# Altium PCB SEN_REVC.PcbDoc
Units mm, origin at the board's own origin, x right, y up, seen from the top; angles counter-clockwise.
Board outline 95.88 x 101.01 mm, 4 copper layers (Top Layer, GND, GND (Plane2), Bottom Layer), stack 1.586 mm thick; 59 components, 95 nets, 247 pads, 113 vias.
Unrouted connection lines stored in the file: 1.
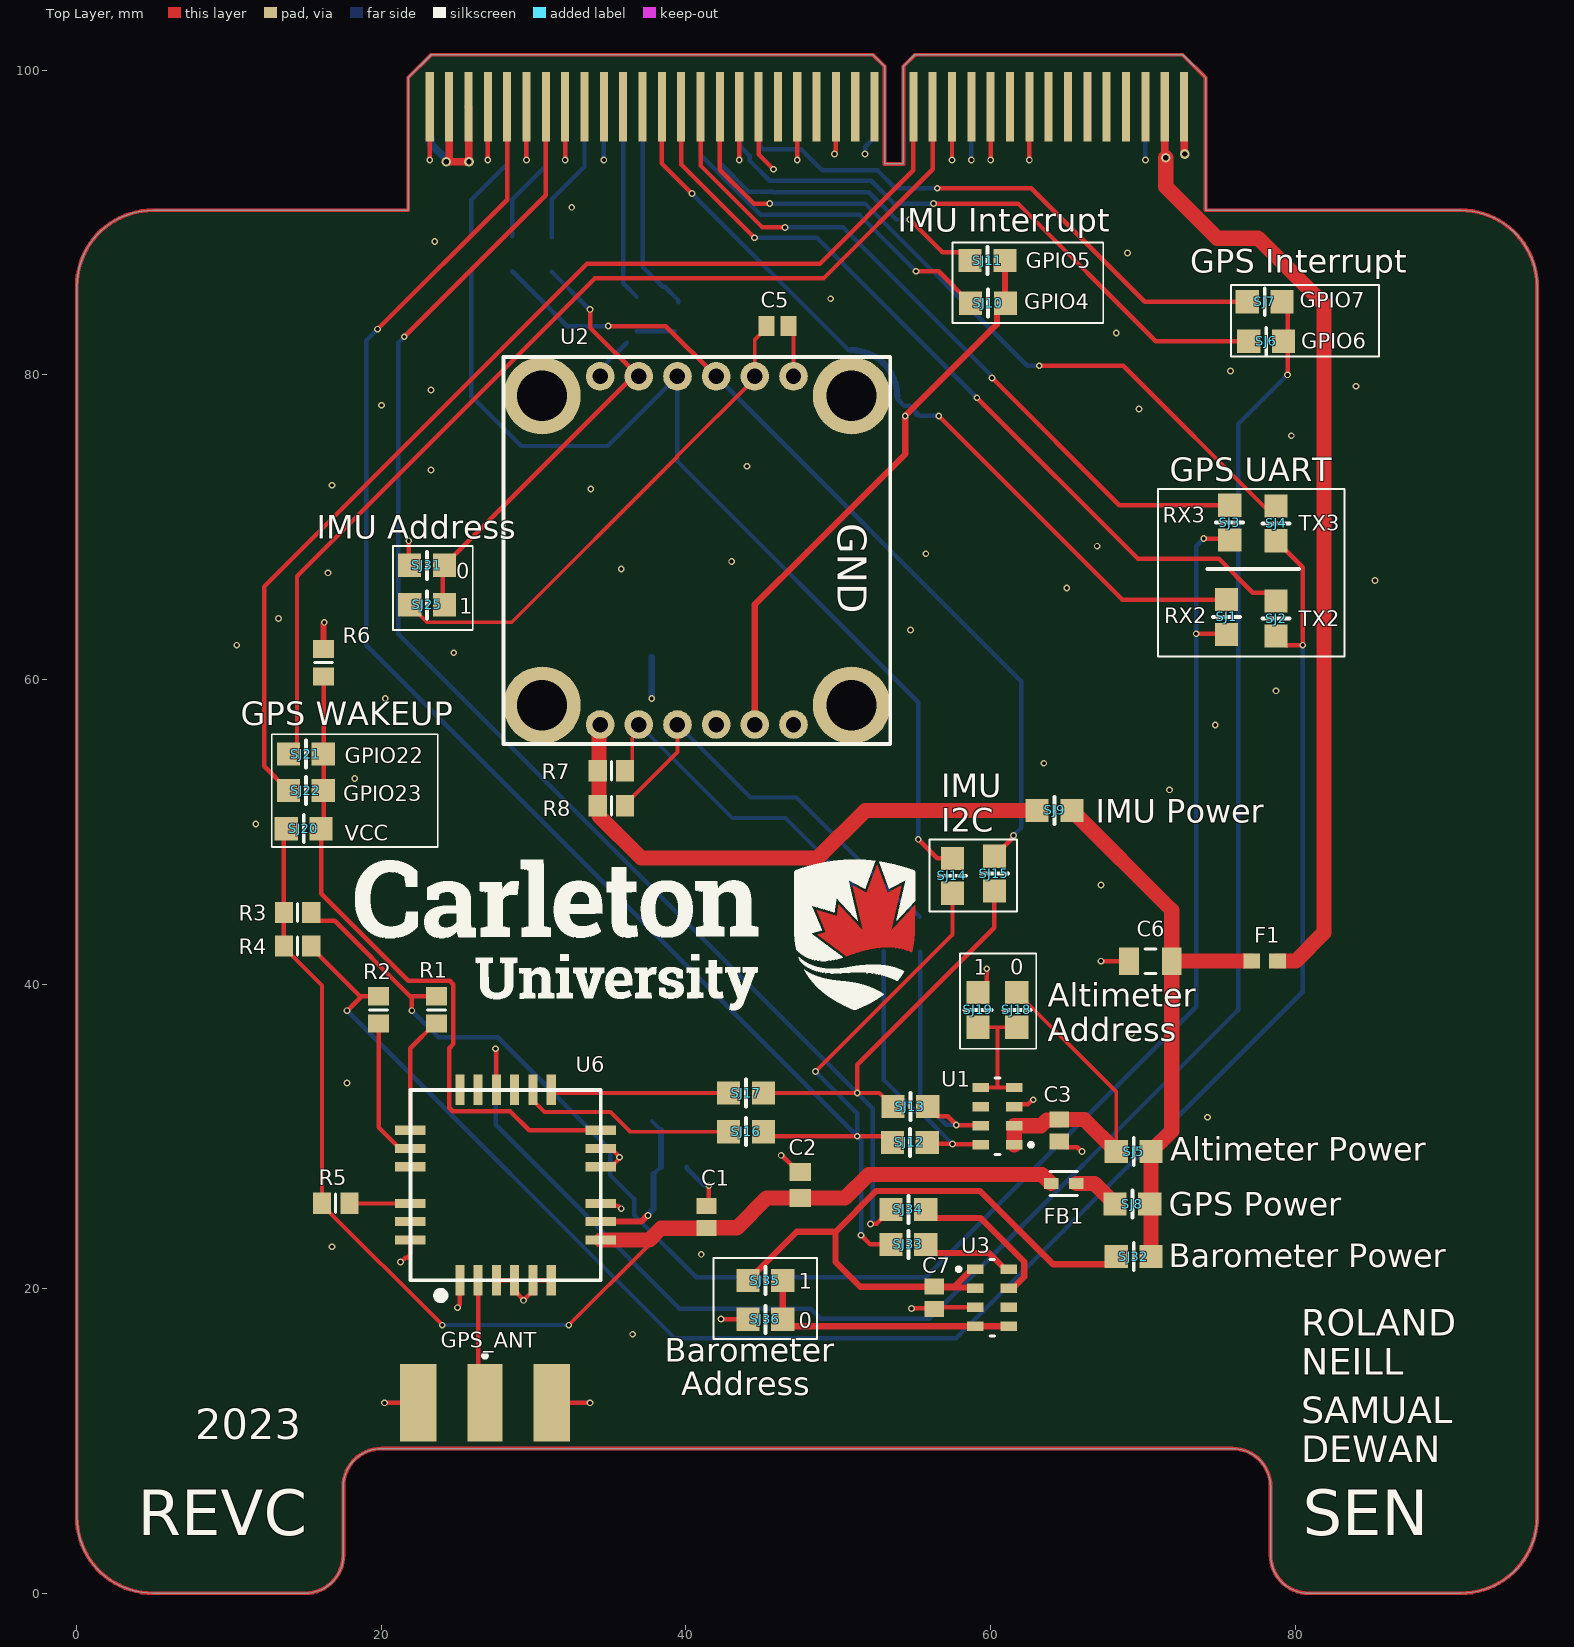
[diagram p0: Top Layer view]
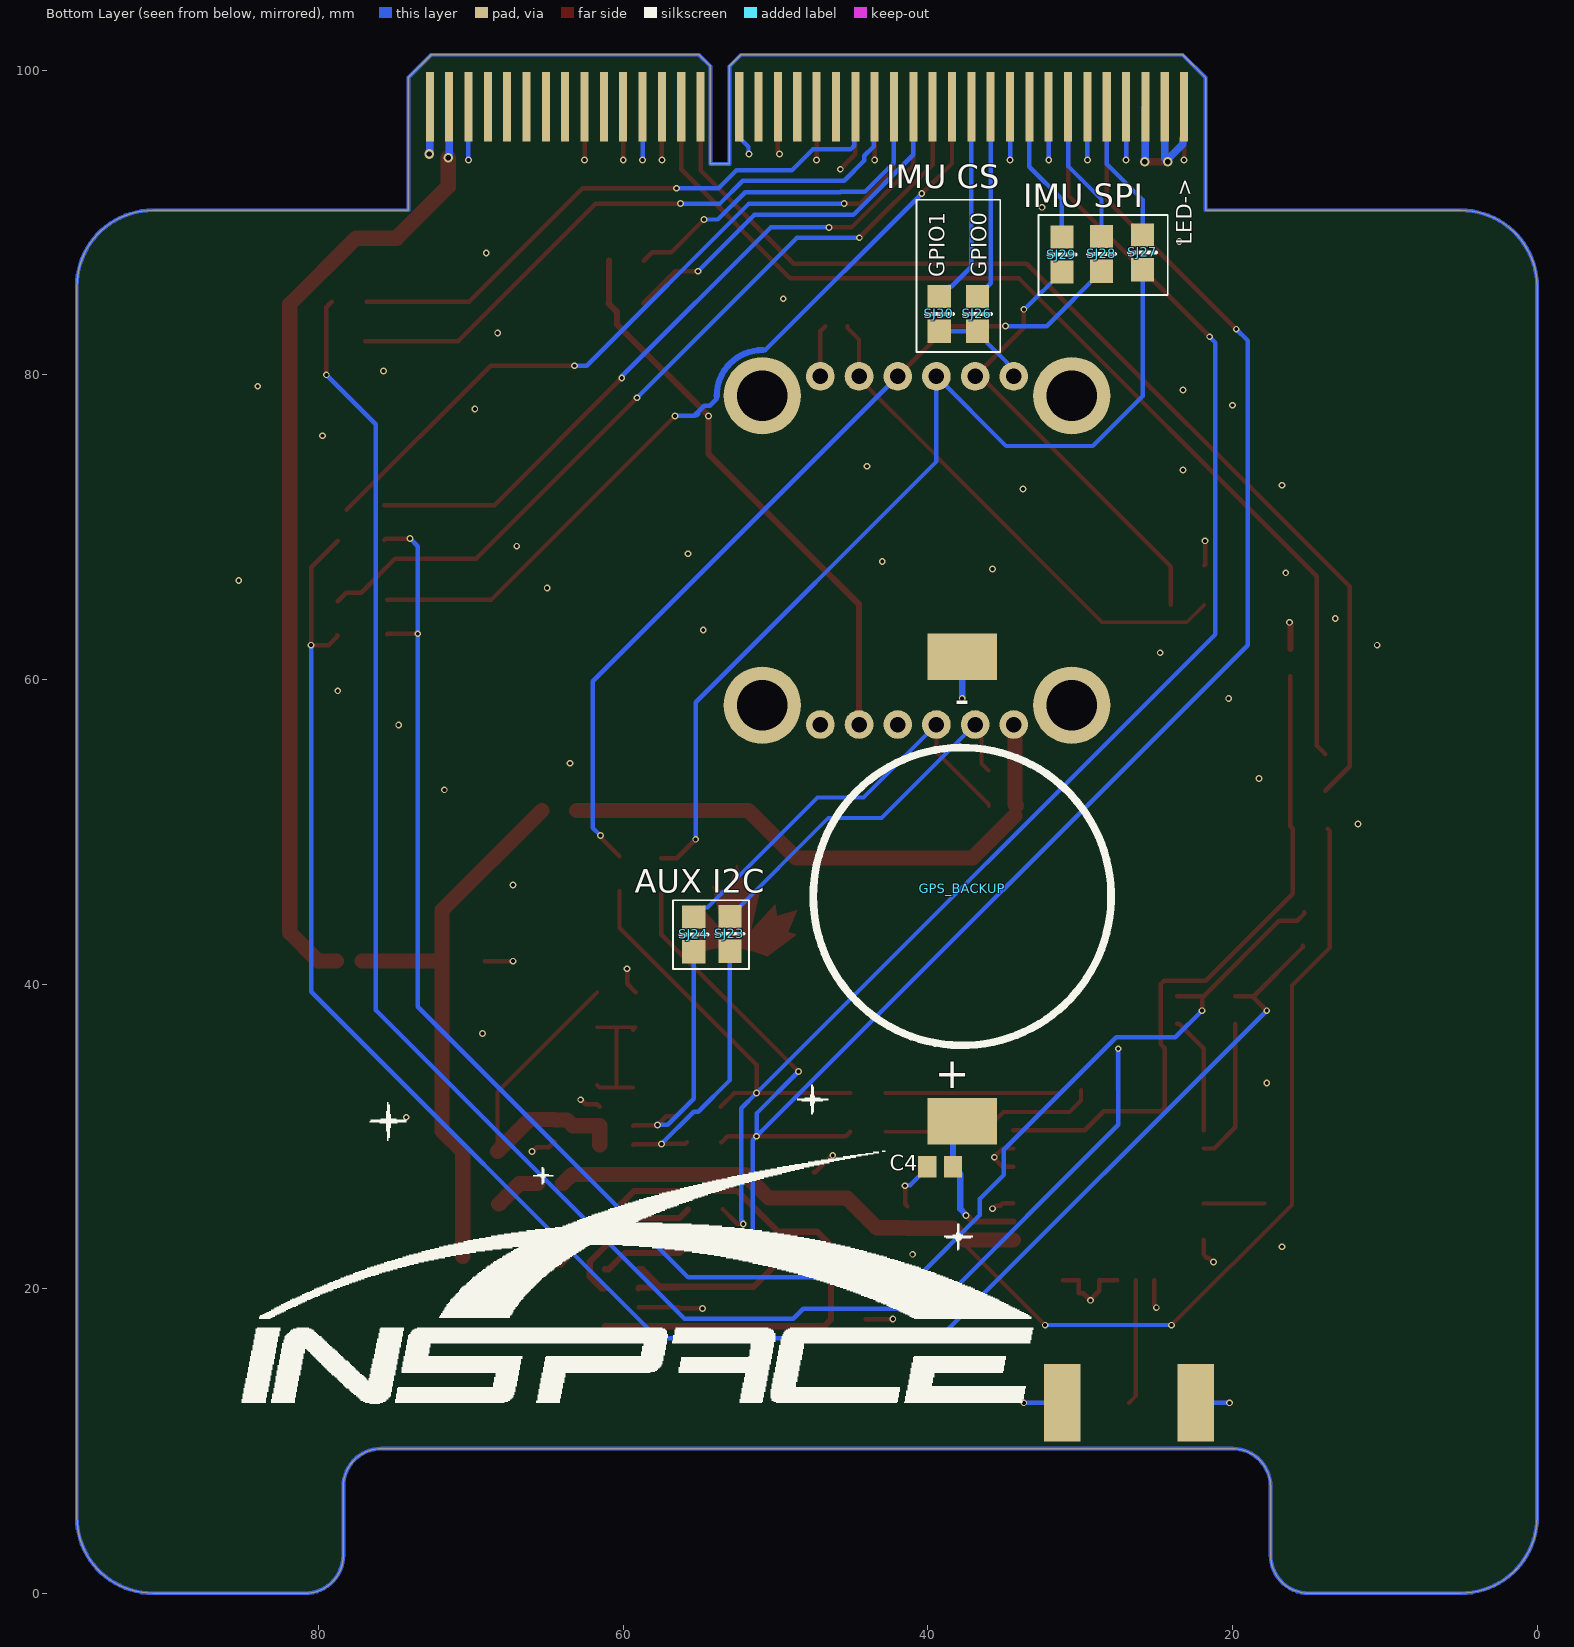
[diagram p1: Bottom Layer view, seen from below]
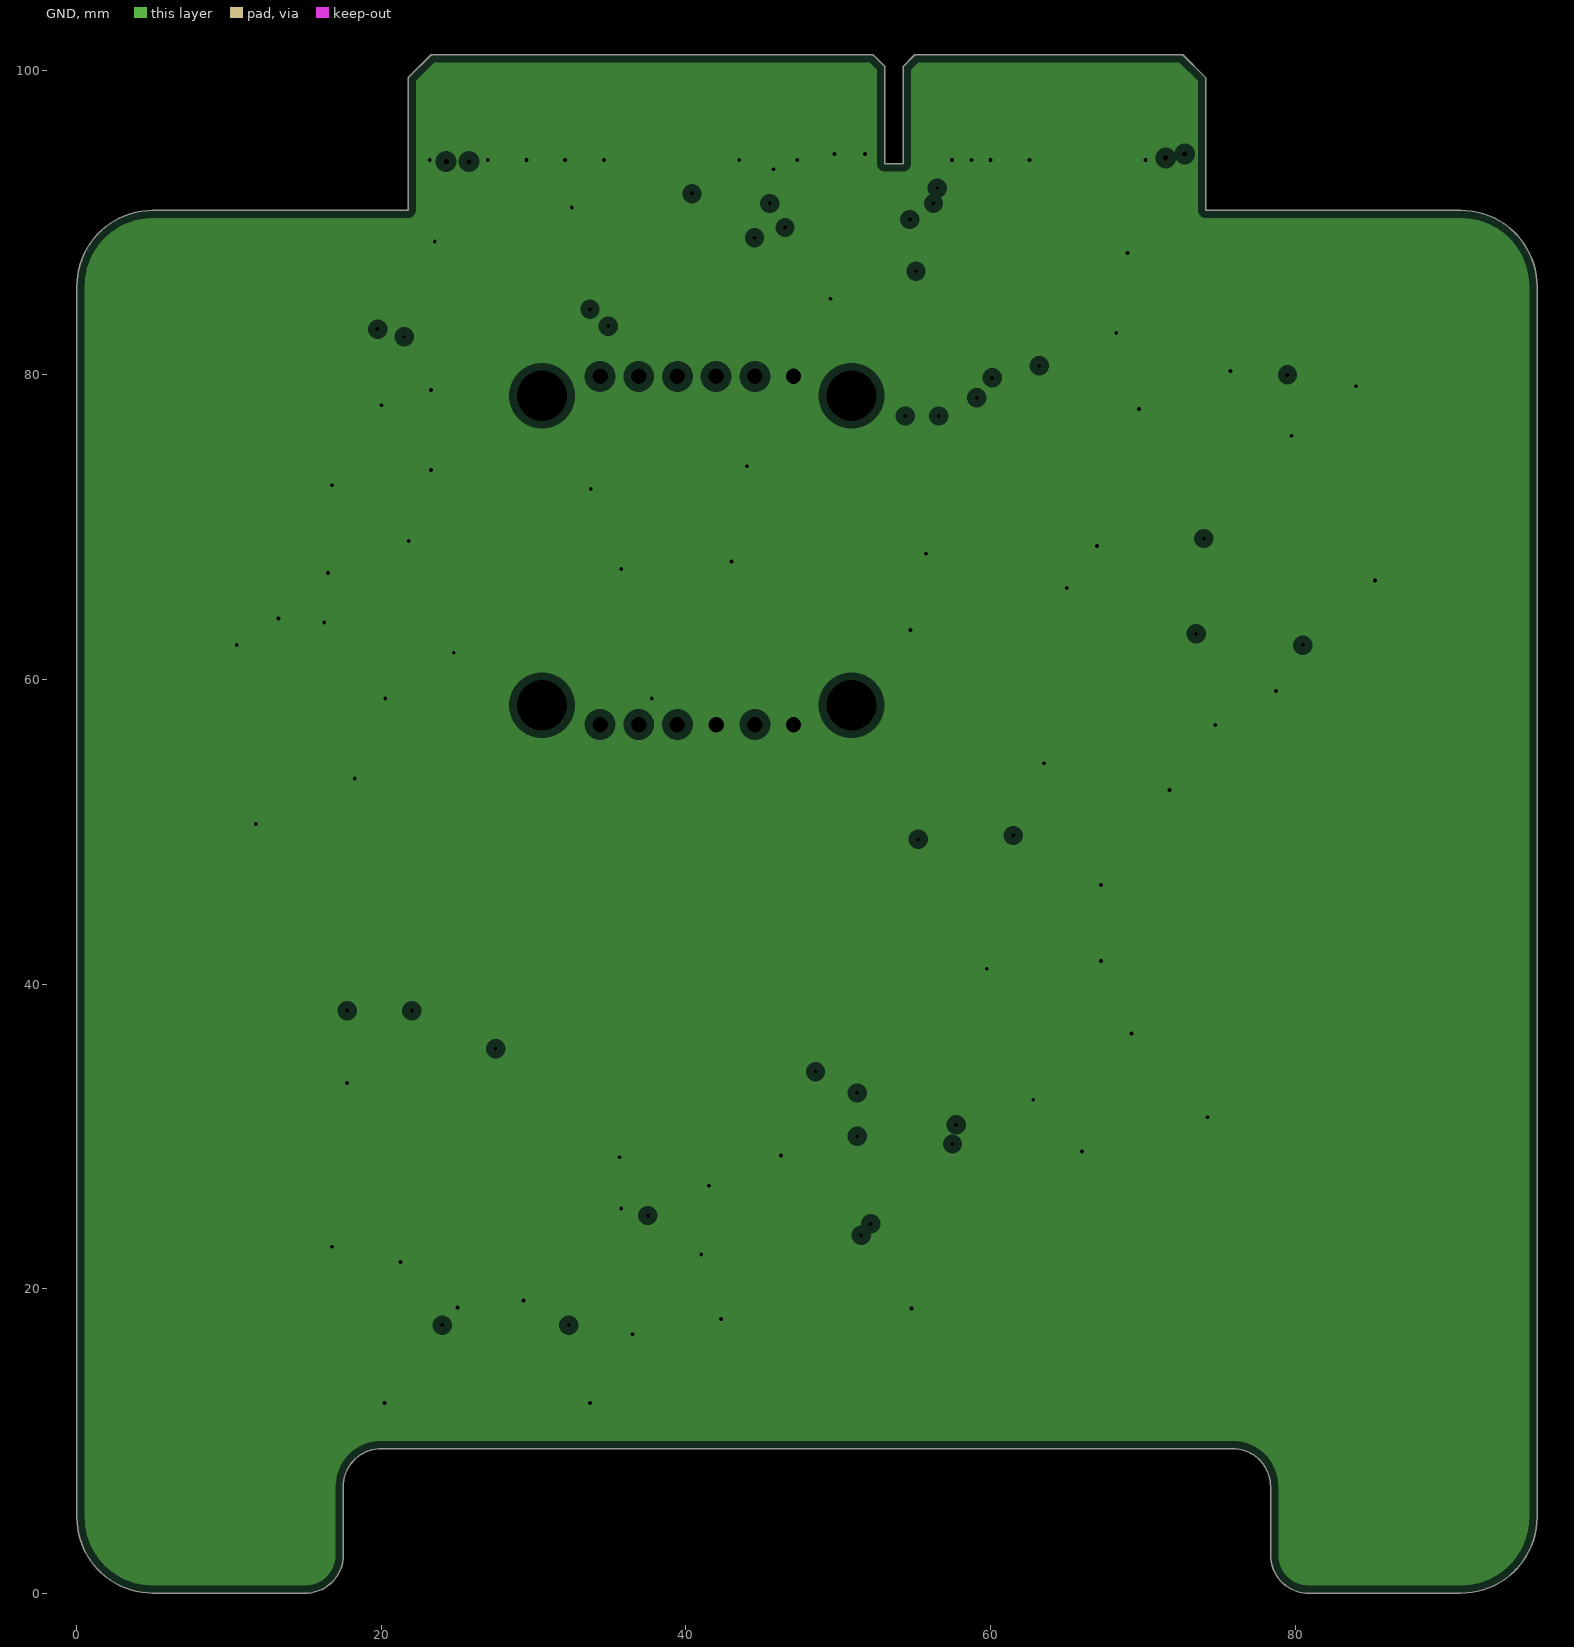
[diagram p2: GND, clearances drawn from the general rule]
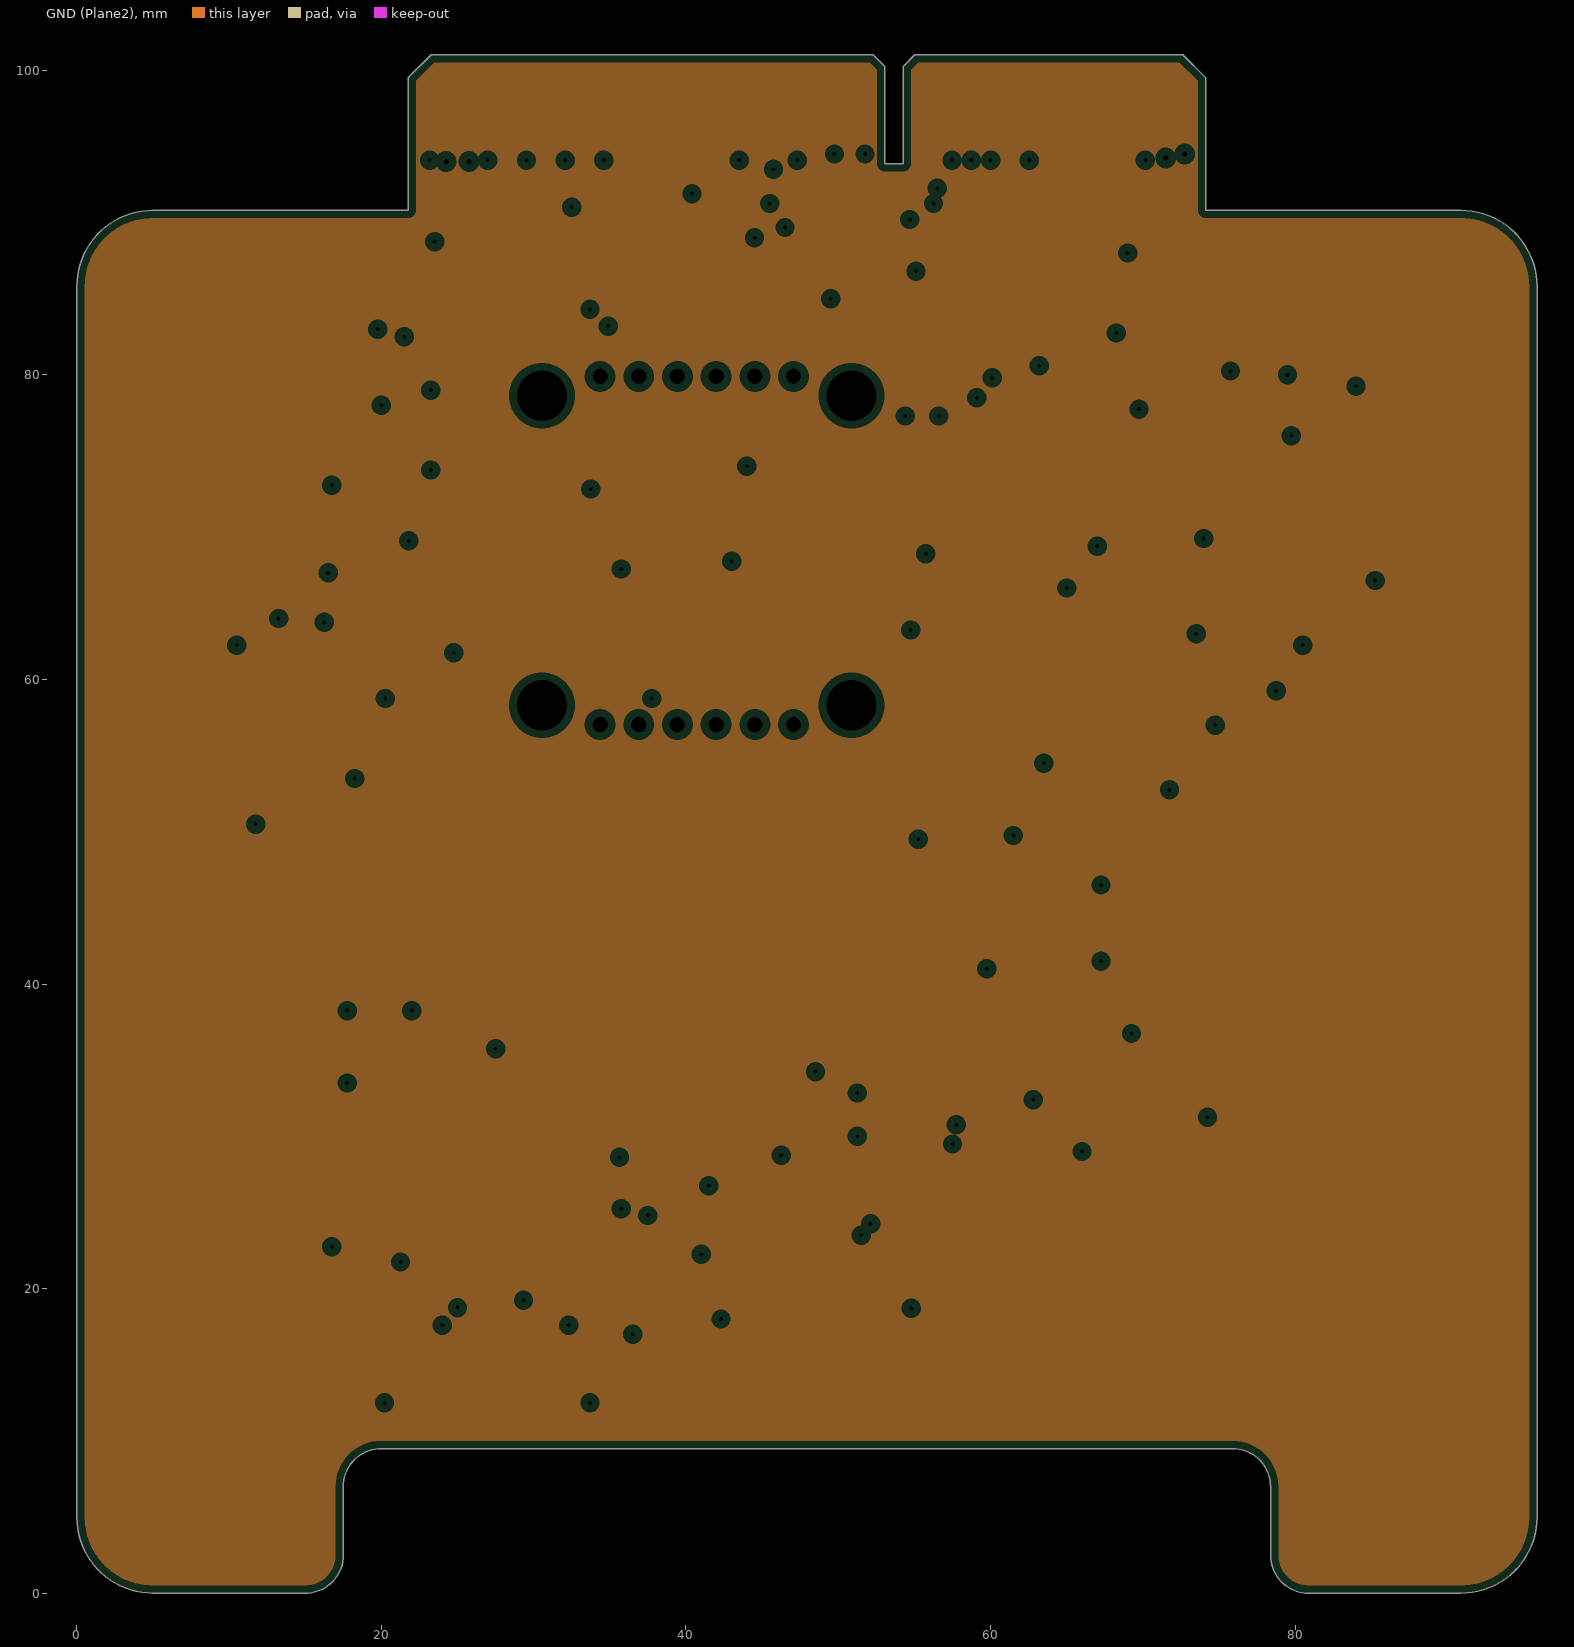
[diagram p3: GND (Plane2), clearances drawn from the general rule]

## Layer stack, top to bottom
Top Solder: solder mask 0.0203, Solder Resist, Dk 3.8
Top Layer: signal copper 0.035
Dielectric 2: prepreg 0.2104, PP-006, Dk 4.6
GND: plane copper 0.0152, net GND
Dielectric 1: dielectric 1.065, FR-4, Dk 4.6
GND (Plane2): plane copper 0.0152, net GND
Dielectric 3: prepreg 0.2104, PP-006, Dk 4.6
Bottom Layer: signal copper 0.035
Bottom Solder: solder mask 0.0203, Solder Resist, Dk 3.8

## Board outline
5,0 15,0 ccw(c15,2.5) 17.5,2.5 17.5,7 cw(c20,7) 20,9.5 75.885,9.5 cw(c75.885,7) 78.385,7 78.385,2.5 ccw(c80.885,2.5) 80.885,0 90.885,0 ccw(c90.885,5) 95.885,5 95.885,85.805 ccw(c90.885,85.805) 90.885,90.805 74.117,90.805 74.117,99.517 72.617,101.015 55.027,101.015 54.277,100.265 54.277,93.855 53.037,93.855 53.037,100.265 52.287,101.015 23.267,101.015 21.767,99.517 21.768,90.805 5,90.805 ccw(c5,85.805) 0,85.805 0,5 ccw(c5,5)

## Design rules (kind name [scope] priority, off if disabled: settings)
Clearance [All] p1: gap=0.254 ignorepadtopadclearanceinfootprint=TRUE except(0: Arc-Hole Track-Hole SMDPad-Hole THPad-Hole Via-Hole Fill-Hole Poly-Hole Region-Hole Text-Hole; 0.127: Arc-Arc Arc-Track Track-Track SMDPad-SMDPad THPad-THPad)
PlaneClearance [All] p1: clearance=0.508
PlaneConnect [All] p1: pad.planeconnectstyle=Relief pad.reliefexpansion=0.508 pad.reliefentries=4 pad.reliefconductorwidth=0.254 pad.reliefairgap=0.254 via.planeconnectstyle=Direct via.reliefexpansion=0.508 via.reliefentries=4 via.reliefconductorwidth=0.254 via.reliefairgap=0.254
PolygonConnect [All] p1: connectstyle=Relief reliefconductorwidth=0.254 reliefentries=4 polygonreliefangle="90 Angle" airgapwidth=0.254
RoutingVias [All] p1: holewidth=0.254 width=0.445 viastyle="Through Hole" minholewidth=0.2 minwidth=0.4 maxholewidth=6.3 maxwidth=6.4
SolderMaskExpansion [All] p1: expansion=0.102 istentingtop=FALSE
Width [All] p1: maxlimit=2.5 minlimit=0.127 preferedwidth=0.293 minimp=50.000000 maximp=50.000000 favimp=50.000000
28 further rules are at their usual default settings.

## Classes and differential pairs
component class SEN_REVC_2: C3 C5 C6 C7 R7 R8 SJ5 SJ9 SJ10 SJ11 SJ12 SJ13 SJ14 SJ15 SJ18 SJ19 SJ23 SJ24 SJ25 SJ26 SJ27 SJ28 SJ29 SJ30 SJ31 SJ32 SJ33 SJ34 SJ35 SJ36 U1 U2 U3
component class SEN_REVC_1: C1 C2 C4 FB1 GPS_ANT GPS_BACKUP R1 R2 R3 R4 R5 R6 SJ1 SJ2 SJ3 SJ4 SJ6 SJ7 SJ8 SJ16 SJ17 SJ20 SJ21 SJ22 U6
component class SEN_REVC_0: F1

## Components (designator, comment, footprint, x,y, rotation, side; value= is the part's Value field where it differs from the comment)
C1 "Capacitor 100 nF +/-10% 50 V 0805" CAPC2013X95X50LL10T25 41.351,24.69 r270 top value=100nF
C2 "Capacitor 1 uF +/- 10% 50 V 0805" CAPC2013X135X45NL10T25 47.5,26.8 r270 top value=1µF
C3 "Capacitor 100 nF +/-10% 50 V 0805" CAPC2013X95X50LL10T25 64.516,30.38 r90 top value=100nF
C4 "Capacitor 1 uF +/- 10% 50 V 0805" CAPC2013X135X45NL10T25 39.2,28 r0 bottom value=1µF
C5 "Capacitor 100 nF +/-10% 50 V 0805" CAPC2013X95X50LL10T25 46,83.2 r180 top value=100nF
C6 "Capacitor 10 uF +/- 10% 16 V 1206" CAPC3216X180X50NL20T25 70.5,41.5 r180 top value=10µF
C7 "Capacitor 100 nF +/-10% 50 V 0805" CAPC2013X95X50LL10T25 56.3,19.4 r90 top value=0.1uF
F1 "0603SFF150F/32-2" RESC1608X10N 77.992,41.518 r180 top value=175mR
FB1 "742792651" FP-742792651-MFG 64.8,26.9 r180 top value=200mR
GPS_ANT "142-0701-801" CINC-142-0701-801_V 26.8,12.5 r270 top
GPS_BACKUP "BHSD-2032-SM" BHSD-2032-SM-Footprint-1 37.75,31 r90 bottom
R1 "470 Ω" 6-0805_N 23.622,38.305 r90 top
R2 "470 Ω" 6-0805_N 19.812,38.305 r90 top
R3 "10 KΩ" 6-0805_N 14.5,44.7 r180 top
R4 "10 KΩ" 6-0805_N 14.5,42.5 r180 top
R5 "10 KΩ" 6-0805_N 17,25.6 r0 top
R6 "10 KΩ" 6-0805_N 16.2,61.1 r270 top
R7 "2.2 KΩ" 6-0805_N 35.1,54 r180 top
R8 "2.2 KΩ" 6-0805_N 35.1,51.7 r180 top
SJ1 "Solder Jumper" "Solder Jumper-Footprint-1" 75.5,64.1 r180 top
SJ2 "Solder Jumper" "Solder Jumper-Footprint-1" 78.75,64 r180 top
SJ3 "Solder Jumper" "Solder Jumper-Footprint-1" 75.7,70.3 r180 top
SJ4 "Solder Jumper" "Solder Jumper-Footprint-1" 78.75,70.25 r180 top
SJ5 "Solder Jumper" "Solder Jumper-Footprint-1" 69.4,29 r270 top
SJ6 "Solder Jumper" "Solder Jumper-Footprint-1" 78.1,82.2 r270 top
SJ7 "Solder Jumper" "Solder Jumper-Footprint-1" 78,84.8 r270 top
SJ8 "Solder Jumper" "Solder Jumper-Footprint-1" 69.317,25.554 r270 top
SJ9 "Solder Jumper" "Solder Jumper-Footprint-1" 64.2,51.4 r270 top
SJ10 "Solder Jumper" "Solder Jumper-Footprint-1" 59.832,84.705 r270 top
SJ11 "Solder Jumper" "Solder Jumper-Footprint-1" 59.8,87.5 r270 top
SJ12 "Solder Jumper" "Solder Jumper-Footprint-1" 54.7,29.6 r90 top
SJ13 "Solder Jumper" "Solder Jumper-Footprint-1" 54.737,31.955 r90 top
SJ14 "Solder Jumper" "Solder Jumper-Footprint-1" 57.5,47.107 r0 top
SJ15 "Solder Jumper" "Solder Jumper-Footprint-1" 60.25,47.25 r0 top
SJ16 "Solder Jumper" "Solder Jumper-Footprint-1" 43.942,30.304 r90 top
SJ17 "Solder Jumper" "Solder Jumper-Footprint-1" 43.942,32.844 r90 top
SJ18 "Solder Jumper" "Solder Jumper-Footprint-1" 61.722,38.305 r0 top
SJ19 "Solder Jumper" "Solder Jumper-Footprint-1" 59.182,38.305 r180 top
SJ20 "Solder Jumper" "Solder Jumper-Footprint-1" 14.9,50.2 r270 top
SJ21 "Solder Jumper" "Solder Jumper-Footprint-1" 15.043,55.1 r270 top
SJ22 "Solder Jumper" "Solder Jumper-Footprint-1" 15.043,52.7 r270 top
SJ23 "Solder Jumper" "Solder Jumper-Footprint-1" 53,43.3 r180 bottom
SJ24 "Solder Jumper" "Solder Jumper-Footprint-1" 55.372,43.258 r180 bottom
SJ25 "Solder Jumper" "Solder Jumper-Footprint-1" 23,64.9 r270 top
SJ26 "Solder Jumper" "Solder Jumper-Footprint-1" 36.75,84 r0 bottom
SJ27 "Solder Jumper" "Solder Jumper-Footprint-1" 25.9,88.043 r0 bottom
SJ28 "Solder Jumper" "Solder Jumper-Footprint-1" 28.6,87.943 r0 bottom
SJ29 "Solder Jumper" "Solder Jumper-Footprint-1" 31.2,87.9 r0 bottom
SJ30 "Solder Jumper" "Solder Jumper-Footprint-1" 39.25,84 r0 bottom
SJ31 "Solder Jumper" "Solder Jumper-Footprint-1" 22.992,67.495 r270 top
SJ32 "Solder Jumper" "Solder Jumper-Footprint-1" 69.4,22.1 r270 top
SJ33 "Solder Jumper" "Solder Jumper-Footprint-1" 54.6,22.9 r90 top
SJ34 "Solder Jumper" "Solder Jumper-Footprint-1" 54.6,25.2 r90 top
SJ35 "Solder Jumper" "Solder Jumper-Footprint-1" 45.212,20.525 r90 top
SJ36 "Solder Jumper" "Solder Jumper-Footprint-1" 45.212,17.985 r270 top
U1 "MS561101BA03-50" MSI-MS561101BA03-50-8_V 60.452,31.32 r180 top
U2 "ICM-20948 Breakout" "New footprint 1" 53.41,81.17 r180 top
U3 "MS561101BA03-50" MSI-MS561101BA03-50-8_V 60.1,19.4 r0 top
U6 "XA1110" XA1110-Footprint-1 34.4,20.55 r90 top

## Footprints (in the part's own frame and the unit in brackets; to place one, negate y for a bottom-side part, rotate by r counter-clockwise, add the part's x,y. Pads: shape width x height; smd on the part's side, far side on the other; paste and mask are expansions set on the pad)
6-0805_N [mm] "Chip Resistor, Body 2.0x1.2mm, IPC Medium Density"
  rect 1.2x1.4 smd: 1(-0.9,0) 2(0.9,0)
  silkscreen extent 0,-0.6 0,0.6, body extent -1.07,-0.7 1.07,0.7, height 0.7
BHSD-2032-SM-Footprint-1 [mil]
  rect 120x180 smd: 1(0,0) 2(1200,0)
  body extent -30,-435 1230,423, height 187
CAPC2013X95X50LL10T25 [mm] "Chip Capacitor, 2-Leads, Body 2.10x1.35mm, IPC High Density"
  rect 1.05x1.3 smd: 1(-0.725,0) 2(0.725,0)
  body extent -1.05,-0.67 1.05,0.67, height 0.95
CAPC2013X135X45NL10T25 [mm] "Chip Capacitor, 2-Leads, Body 2.10x1.35mm, IPC Medium Density"
  rect 1.2x1.4 smd: 1(-0.85,0) 2(0.85,0)
  body extent -1.05,-0.67 1.05,0.67, height 1.35
CAPC3216X180X50NL20T25 [mm] "Chip Capacitor, 2-Leads, Body 3.40x1.80mm, IPC Medium Density"
  rect 1.3x1.8 smd: 1(-1.4,0) 2(1.4,0)
  silkscreen extent -0.35,-0.8 0.35,0.8, body extent -1.7,-0.9 1.7,0.9, height 1.8
CINC-142-0701-801_V [mil] "SMA Connector, 5-Leads, Body 14.275x9.525mm"
  rect 200x90 smd: 1(0,0)
  rect 200x95 smd: 2(0,172.5) 3(0,-172.5)
  rect 200x95 smd far side: 4(0,172.5) 5(0,-172.5)
  silkscreen extent -127,-5 -117,5, body extent -87,-187 475,188, height 171
FP-742792651-MFG [mm]
  rect 0.95x0.7 smd paste+0 mask+0: 1(-0.825,0) 2(0.825,0)
  silkscreen extent -0.9,-0.8 0.9,0.8
MSI-MS561101BA03-50-8_V [mm] "SMD, 8-Leads, Body 5x3mm, Pitch 1.25mm"
  rect 1.1x0.6 smd: 1(-1.1,1.875) 2(-1.1,0.625) 3(-1.1,-0.625) 4(-1.1,-1.875) 5(1.1,-1.875) 6(1.1,-0.625) 7(1.1,0.625) 8(1.1,1.875)
  silkscreen extent -2.32,-2.5 0.15,2.5, body extent -1.5,-2.5 1.5,2.5, height 1
"New footprint 1" [mil]
  round 74 hole 40: 1(250,950) 2(350,950) 3(450,950) 4(550,950) 5(650,950) 6(750,950) 7(250,50) 8(350,50) 9(450,50) 10(550,50) 11(650,50) 12(750,50)
  round 200 hole 130: 80(100,100) 81(100,900) 82(900,900) 83(900,100)
  silkscreen extent 0,0 1000,1000
RESC1608X10N [mm] "Chip Resistor, 2-Leads, Body 1.60x0.80mm, IPC Medium Density"
  rect 1.09x1 smd: 1(-0.85,0) 2(0.85,0)
  body extent -0.87,-0.48 0.87,0.48, height 0.95
"Solder Jumper-Footprint-1" [mil]
  rect 60x60 smd: 1(0,45) 2(0,-45)
  silkscreen extent -35,0 35,0
XA1110-Footprint-1 [mm]
  rect 2x0.6 smd: 1(0,9.25) 2(0,8.05) 3(0,6.85) 4(0,5.65) 5(0,4.45) 6(0,3.25) 13(12.5,3.25) 14(12.5,4.45) 15(12.5,5.65) 16(12.5,6.85) 17(12.5,8.05) 18(12.5,9.25)
  rect 0.6x2 smd: 7(2.65,0) 8(3.85,0) 9(5.05,0) 10(7.45,0) 11(8.65,0) 12(9.85,0) 19(9.85,12.5) 20(8.65,12.5) 21(7.45,12.5) 22(5.05,12.5) 23(3.85,12.5) 24(2.65,12.5)
  silkscreen extent -1.25,0 12.5,12.5, body extent 0,0 12.5,12.5, height 7

## Part data
C1 C3 C5 C7: library part CMP-001-00018-6, "Chip Capacitor, 100 nF, +/- 10%, 50 V, 0805 (2012 Metric)", Capacitor Type=Ceramic, Case/Package=0805, Max Operating Temperature=125°C, Min Operating Temperature=-55°C, Tolerance=10%, Voltage Rating=50V, Mounting Technology=SM, Pins=2, RoHS Compliant=True
C2 C4: library part CMP-001-00007-6, "Chip Capacitor, 1 uF, +/- 10%, 50 V, 0805 (2012 Metric)", Capacitor Type=Ceramic, Case/Package=0805, Max Operating Temperature=125°C, Min Operating Temperature=-55°C, Tolerance=10%, Voltage Rating=50V, Mounting Technology=SM, Pins=2, RoHS Compliant=True
C6: library part CMP-001-00016-6, "Chip Capacitor, 10 uF, +/- 10%, 16 V, 1206 (3216 Metric)", Capacitor Type=Ceramic, Case/Package=1206, Max Operating Temperature=125°C, Min Operating Temperature=-55°C, Tolerance=10%, Voltage Rating=16V, Mounting Technology=SM, Pins=2, RoHS Compliant=True
F1: library part CMP-00019-1, "0603SFF Series - 0603 Size Lead-Free, Halogen Free, Fast-Acting Chip Fuse, 1.5 A, 63 VDC, RoHS", Case Code (Imperial)=0603, Case Code (Metric)=1608, Current=500mA, DC Cold Resistance=175mR, Max Operating Temperature=105°C, Min Operating Temperature=-20°C, Package Quantity=10000, Voltage Rating=50V, Approvals=UL, Case/Package=0603, Contact Plating=Tin, Current Rating=500mA, Depth=0.8mm, Fuse Current=500mA, Fuse Type="Board Mount (Cartridge Style Excluded)", Height=0.45mm, Length=1.6mm, Mounting Technology="Surface Mount", Packaging="Tape and Reel", Pins=2, Reach SVHC Compliant=Yes, RoHS Compliant=Yes, Series=SF-0603S, Termination=SMD/SMT, Voltage Rating (DC)=50V, Width=0.8mm
FB1: library part CMP-00022-1, "Ferrite Beads WE-CBF 0603 SMD Bead 100MHz 600Ohm 1000mA", Case Code (Imperial)=0603, Case Code (Metric)=1608, Case/Package=SMD/SMT, Current Rating=1A, DC Resistance (DCR)=200mR, Max Operating Temperature=125°C, Min Operating Temperature=-55°C, Package Quantity=1, Test Frequency=100MHz, Tolerance=25%, Core Material=Ferrite, Depth=0.8mm, Height=0.8mm, Impedance=600R, Lead Free="Lead Free", Length=1.6mm, Material=Ferrite, Max Current Rating=1A, Max DC Current=1A, Mounting Technology="Surface Mount", Number of Lines=1, Packaging="Tape and Reel", RoHS Compliant=Yes, Series=WE-CBF, Termination=SMD/SMT, Weight=0.000141oz, Width=0.8mm
GPS_ANT: library part CMP-004-000004-3, "RF Connectors / Coaxial Connectors SMA ST PCB-JCK STD EMT", Case/Package=SMA, Clock Frequency=18GHz, Dielectric Material=PTFE, Housing Color=Gold, Max Operating Temperature=165°C, Min Operating Temperature=-65°C, Operating Frequency=N/A, Package=5MMSMA, Package Quantity=1600, Voltage Rating=500V, Body Material=Brass, Body Plating=Gold, Center Contact Plating=Gold, Connector Type=SMA,Coaxial, Contact Material=Copper, Contact Plating=Gold, Depth=16.26mm, Design Item ID=5MMSMA, DeviceSetName=5MMSMA, Fastening Type=Threaded, GateName_1=G$1, Gender=Female, Halogen Free="Low Halogen", Impedance=50R, Insulation Material=Polytetrafluoroethylene, Lead Free="Lead Free", Length=6.35mm, LibraryName="CU inSpace 2019 Parts", Mating Cycles=500, Mounting Technology=Edge, Number of Ports=1, Orientation=Straight, Packaging=Bulk, Plating=Gold, Polarity=Standard, Radiation Hardening=No, RoHS Compliant=No, Series=73251, Source="CU inSpace 2019 Parts.SCHLIB", SymbolName_1=BNC-F2, Termination=Solder
GPS_BACKUP: library part CMP-001-0000-2, "Battery Holder 1 Cells Liquid Crystal Polymer Vectra T/R"
R1 R2 R3 R4 R5 R6 R7 R8: library part R-US_R1206, "RESISTOR, American symbol", DeviceName=R1206, DeviceSetName=R-US_, GateName_1=G$1, LibraryName=rcl, SPICEPREFIX=R, SymbolName_1=R-US
SJ1 SJ2 SJ3 SJ4 SJ5 SJ6 SJ7 SJ8 SJ9 SJ10 SJ11 SJ12 SJ13 SJ14 SJ15 SJ16 SJ17 SJ18 SJ19 SJ20 SJ21 SJ22 SJ23 SJ24 SJ25 SJ26 SJ27 SJ28 SJ29 SJ30 SJ31 SJ32 SJ33 SJ34 SJ35 SJ36: library part CMP-00020-3
U1 U3: library part CMP-002-000017-2, "Pressure Sensor 1.44V to 3.6V 0.01bar to 1.2bar Absolute 8-Pin QFN T/R", Case/Package=QFN, Max Operating Temperature=85°C, Max Supply Voltage=3.6V, Min Operating Temperature=-40°C, Min Supply Voltage=1.8V, Nominal Supply Current=12.5uA, Operating Supply Voltage=3V, Package=SON125P500X300X100-8N, Package Quantity=3600, Availability=Unavailable, Component Type=Standard, Design Item ID=MS561101BA03-50, DeviceSetName=MS561101BA03-50, EU_ROHS_COMPLIANCE=Compliant, GateName_1=G$1, Interface=I2C,SPI, LibraryName="Sensors Board", MF="TE Connectivity", Mounting Technology="Surface Mount", MP=MS561101BA03-50, Operating Supply Current=12.5uA, Output Type=Digital, Output Voltage=3.6V, Packaging="Tape and Reel", Pin Count=7, Pins=8, Pressure Type=Barometric, Price=None, Radiation Hardening=No, Reach SVHC Compliant=Yes, Resolution=24b, RoHS Compliant=Yes, Source="Sensors Board.SCHLIB", Supply Current=12.5uA, SymbolName_1=MS561101BA03-50, TE_PURCHASE_URL=https://www.te.com/usa-en/product-MS561101BA03-50.html?te_bu=Cor&te_type=disp&te_campaign=seda_glo_cor-seda-global-disp-prtnr-fy19-seda-model-bom-cta_sma-317_1&elqCampaignId=32493
U2: library part CMP-00021-1, "Sparkfun ICM-20948 breakout"
U6: library part CMP-002-000018-2, "Rx Txrx Module Surface Mount", Component Type=Standard, Design Item ID=XA1110, DeviceSetName=XA1110, GateName_1=G$1, LibraryName="Sensors Board", Package=XA1110, Pin Count=16, Source="Sensors Board.SCHLIB", SymbolName_1=XA1110

## Free pads (board coordinates)
  rect 0.53x4.572 smd: 1(72.707,97.6) 3(71.437,97.6) 5(70.167,97.6) 7(68.897,97.6) 9(67.627,97.6) 11(66.357,97.6) 13(65.087,97.6) 15(63.817,97.6) 17(62.547,97.6) 19(61.277,97.6) 21(60.007,97.6) 23(58.737,97.6) 25(57.467,97.6) 27(56.197,97.6) 29(54.927,97.6) 31(52.387,97.6) 33(51.117,97.6) 35(49.847,97.6) 37(48.577,97.6) 39(47.307,97.6) 41(46.037,97.6) 43(44.767,97.6) 45(43.497,97.6) 47(42.227,97.6) 49(40.957,97.6) 51(39.687,97.6) 53(38.417,97.6) 55(37.147,97.6) 57(35.877,97.6) 59(34.607,97.6) 61(33.337,97.6) 63(32.067,97.6) 65(30.797,97.6) 67(29.527,97.6) 69(28.257,97.6) 71(26.987,97.6) 73(25.717,97.6) 75(24.447,97.6) 77(23.177,97.6)
  rect 0.53x4.572 smd far side: 2(72.707,97.6) 4(71.437,97.6) 6(70.167,97.6) 8(68.897,97.6) 10(67.627,97.6) 12(66.357,97.6) 14(65.087,97.6) 16(63.817,97.6) 18(62.547,97.6) 20(61.277,97.6) 22(60.007,97.6) 24(58.737,97.6) 26(57.467,97.6) 28(56.197,97.6) 30(54.927,97.6) 32(52.387,97.6) 34(51.117,97.6) 36(49.847,97.6) 38(48.577,97.6) 40(47.307,97.6) 42(46.037,97.6) 44(44.767,97.6) 46(43.497,97.6) 48(42.227,97.6) 50(40.957,97.6) 52(39.687,97.6) 54(38.417,97.6) 56(37.147,97.6) 58(35.877,97.6) 60(34.607,97.6) 62(33.337,97.6) 64(32.067,97.6) 66(30.797,97.6) 68(29.527,97.6) 70(28.257,97.6) 72(26.987,97.6) 74(25.717,97.6) 76(24.447,97.6) 78(23.177,97.6)

## Via types
v1: diameter 0.444, hole 0.254, Top Layer to Bottom Layer, 109 vias
v2: diameter 0.635, hole 0.356, Top Layer to Bottom Layer, 4 vias

## Nets (pads, with @x,y where several pads share a name; then routed paths per layer and width w, separated by ;. In a path a pad name is that pad's centre, name@x,y a point inside that pad or via, vN(x,y) a via of type N, cw(c..) or ccw(c..) an arc to the next point about the centre after c; other vN are vias at no path point)
3.3V_FUSED: C6.1 F1.2 SJ5.1 SJ8.1 SJ9.1 SJ32.1 | length 37.8
  Top Layer w1: SJ9.1 71.9,44.843 C6.1 ; SJ32.1 SJ5.1 71.9,30.357 C6.1 ; F1.2 71.918,41.518 C6.1
3V3: F1.1 pad.3 pad.4 pad.73 pad.74 pad.75 pad.76 pad.78 | length 87.1
  Top Layer w0.5: v2(24.25,94) v2(25.75,94) 25.732,94.018 25.732,97.585 pad.73 ; v2@24.447,94.233 pad.75 ; pad.3 71.437,94.35 71.5,94.287 v2(71.5,94.25)
  Top Layer w1: v2(71.5,94.25) 71.5,92.356 74.88,88.976 77.557,88.976 81.9,84.633 81.9,43.372 80.046,41.518 F1.1
  Bottom Layer w0.5: pad.78@23.192,97.52 23.192,95.564 23.257,95.499 23.257,95.143 24.224,94.176 24.224,94.026 v2(24.25,94) 24.25,94.037 24.447,94.234 pad.76 ; pad.74 25.732,97.585 25.732,94.018 v2(25.75,94) ; pad.4 71.437,94.313 v2(71.5,94.25)
+5V: pad.1 pad.2 | length 6.2
  Top Layer w0.5: pad.1 72.722,97.585 72.722,94.565 72.75,94.537 v2(72.75,94.5)
  Bottom Layer w0.5: pad.2 72.722,97.585 72.722,94.565 72.75,94.537 v2(72.75,94.5)
A0: pad.22
A1: pad.20
A2: pad.18
A3: pad.16
A4: pad.14
A5: pad.12
A6: pad.10
A7: pad.8
A12: pad.31
A13: pad.33
ALT2_SCL: SJ33.2 U3.8 | length 6.1
  Top Layer w0.406: SJ33.2 56.302,22.341 59.884,22.341 60.95,21.275 U3.8
ALT2_SDA: SJ34.2 U3.7 | length 10.2
  Top Layer w0.406: SJ34.2 56.302,24.641 59.33,24.641 62.207,21.764 62.207,20.782 61.45,20.025 U3.7
ALT_SCL: SJ12.2 SJ23.2 U1.8 | length 18.3
  Top Layer w0.293: SJ12.2 55.943,29.5 v1(57.5,29.5) 57.528,29.472 59.324,29.472 U1.8
  Bottom Layer w0.293: SJ23.2 53,33.695 55.079,31.616 55.384,31.616 v1(57.5,29.5)
ALT_SDA: SJ13.2 SJ24.2 U1.7 | length 16.7
  Top Layer w0.293: SJ13.2 56.515,31.32 57.18,31.32 57.778,30.722 59.324,30.722 U1.7
  Bottom Layer w0.293: SJ24.2 55.372,32.463 57.085,30.75 v1(57.75,30.75)
AUX_SCL: R7.1 SJ23.1 U2.5 | length 24.7
  Top Layer w0.254: R7.1 36.473,54.473 36.473,56.173 36.9,56.6 U2.5
  Bottom Layer w0.254: U2.5 43.037,50.903 46.54,50.903 SJ23.1
AUX_SDA: R8.1 SJ24.1 U2.4 | length 27.9
  Top Layer w0.254: R8.1 36,51.8 39.44,55.24 U2.4
  Bottom Layer w0.254: U2.4 44.23,52.25 47.256,52.25 54.47,45.036 54.737,45.036 SJ24.1
DAC0: pad.41
DAC1: pad.37
GND: C1.1 C2.1 C3.1 C4.2 C5.1 C6.2 C7.1 GPS_ANT.2 GPS_ANT.3 GPS_ANT.4 GPS_ANT.5 GPS_BACKUP.2 pad.6 pad.17 pad.21 pad.24 pad.25 pad.32 pad.35 pad.39 pad.43 pad.45 pad.60 pad.63 pad.64 pad.67 pad.68 pad.71 pad.72 pad.77 R6.1 SJ19.2 SJ31.2 SJ36.2 U1.3 U2.1 U2.3 U2.7 U3.3 U6.1 U6.3 U6.4 U6.5 U6.6 U6.9 U6.10 U6.11 U6.24 | length 114.4
  Top Layer w0.293: v1(20.2,12.5) GPS_ANT.3 ; v1(21.25,21.75) 21.291,21.75 21.576,22.036 21.693,22.036 21.9,22.243 U6.24 ; v1(21.8,69.1) 21.8,67.544 SJ31.2 ; v1(23.177,94.1) pad.77 ; v1(25,18.75) 25,18.791 25.15,18.941 U6.1 ; v1(26.987,94.1) pad.71 ; U6.3 U6.4 28.75,19.85 29.3,19.3 29.3,19.258 v1(29.329,19.229) 29.796,19.696 30.096,19.696 30.1,19.7 30.1,20.546 30.103,20.55 U6.6 ; v1(29.527,94.1) pad.67 ; GPS_ANT.2 v1(33.7,12.5) ; v1(32.067,94.1) pad.63 ; U6.9 35.1,25.6 35.254,25.446 35.513,25.446 35.709,25.25 v1(35.75,25.25) ; U6.10 35.1,28 35.607,28.507 35.607,28.597 v1(35.636,28.626) 35.636,28.664 35.1,29.2 U6.11 ; C1.1 41.5,25.564 v1(41.5,26.75) ; v1(42.3,18) 44.054,18 SJ36.2 ; v1(43.497,94.1) pad.45 ; pad.43 44.767,94.483 v1(45.75,93.5) ; v1(46.25,28.75) 46.279,28.721 46.329,28.721 47.4,27.65 C2.1 ; C5.1 47.06,82.865 U2.7 ; v1(47.307,94.1) pad.39 ; v1(49.75,94.5) 49.75,94.541 49.847,94.638 pad.35 ; v1(54.8,18.7) 56.275,18.7 C7.1 56.4,18.775 U3.3 ; v1(57.467,94.1) pad.25 ; SJ19.2 59.75,40.016 v1(59.75,41) ; v1(60.007,94.1) pad.21 ; U1.3 61.705,32.098 62.457,32.098 62.759,32.4 v1(62.8,32.4) ; v1(62.547,94.1) pad.17 ; C3.1 64.895,29.277 65.683,29.277 65.959,29 v1(66,29) ; v1(67.25,41.5) C6.2
  Top Layer w0.406: R6.1 16.2,63.69 16.25,63.74 v1(16.25,63.75)
  Bottom Layer w0.293: v1(20.2,12.5) GPS_ANT.5 ; v1(26.987,94.1) pad.72 ; v1(29.527,94.1) pad.68 ; GPS_ANT.4 v1(33.7,12.5) ; v1(32.067,94.1) pad.64 ; v1(34.607,94.1) pad.60 ; C4.2 40.05,27.9 41.171,26.779 41.471,26.779 v1(41.5,26.75) ; v1(51.75,94.5) 51.779,94.529 51.779,94.971 52.387,95.579 pad.32 ; v1(58.737,94.1) pad.24 ; v1(70.167,94.1) pad.6
  Bottom Layer w0.406: v1(37.75,58.75) GPS_BACKUP.2
  other v1: 36.5,17 41,22.25 16.75,22.75 74.25,31.25 17.75,33.5 69.25,36.75 67.25,46.5 11.75,50.5 71.75,52.75 18.25,53.5 63.5,54.5 74.75,57 20.25,58.75 78.75,59.25 24.75,61.75 10.5,62.25 54.75,63.25 13.25,64 65,66 85.25,66.5 16.5,67 35.75,67.25 43,67.75 55.75,68.25 67,68.75 33.75,72.5 16.75,72.75 23.25,73.75 44,74 79.75,76 69.75,77.75 20,78 23.25,79 84,79.25 75.75,80.25 68.25,82.75 49.5,85 69,88 23.5,88.75 32.5,91
GPIO0: pad.58 SJ26.2 | length 12.8
  Bottom Layer w0.293: pad.58 35.877,86.016 SJ26.2
GPIO1: pad.56 SJ30.2 | length 13.9
  Bottom Layer w0.293: pad.56 37.147,87.103 38.472,85.778 38.615,85.778 39.482,84.911 SJ30.2@39.482,84.768
GPIO2: pad.54
GPIO3: pad.52
GPIO4: pad.50 SJ10.2 | length 24.9
  Top Layer w0.293: v1(55.1,86.8) 56.594,86.8 SJ10.2
  Bottom Layer w0.293: pad.50 40.957,94.443 44.9,90.5 51.4,90.5 v1(55.1,86.8)
GPIO5: pad.48 SJ11.2 | length 22.8
  Top Layer w0.293: v1(54.7,90.2) 56.841,88.059 58.098,88.059 SJ11.2
  Bottom Layer w0.293: pad.48 42.227,95.579 42.227,93.927 44.142,92.013 45.737,92.013 45.75,92 52,92 53.8,90.2 v1(54.7,90.2)
GPIO6: pad.46 SJ6.2 | length 41.5
  Top Layer w0.293: v1(56.25,91.25) 61.804,91.25 70.854,82.2 SJ6.2
  Bottom Layer w0.293: pad.46 43.559,97.538 43.559,94.998 44.176,94.381 44.176,94.074 45.5,92.75 52.157,92.75 53.657,91.25 v1(56.25,91.25)
GPIO7: pad.44 SJ7.2 | length 37.9
  Top Layer w0.293: v1(56.5,92.25) 62.679,92.25 70.129,84.8 SJ7.2
  Bottom Layer w0.293: pad.44@44.844,96.656 44.844,95.039 45.082,94.802 47.566,94.802 48.946,93.421 52.579,93.421 53.75,92.25 v1(56.5,92.25)
GPIO8: pad.42
GPIO9: pad.40
GPIO10: pad.38
GPIO11: pad.36
GPIO12: pad.34
GPIO13: pad.30
GPIO14: pad.28
GPIO15: pad.26
GPIO22: pad.27 SJ21.2 | length 68.8
  Top Layer w0.293: SJ21.2 14.459,55.659 14.459,66.777 34.013,86.331 49.031,86.331 56.197,93.497 pad.27
GPIO23: pad.29 SJ22.2 | length 72.2
  Top Layer w0.293: SJ22.2 12.3,54.3 12.3,66.1 33.5,87.3 48.8,87.3 54.927,93.427 pad.29
GPS_INT: SJ6.1 SJ7.1 U6.16 | length 118.1
  Top Layer w0.293: v1(27.5,35.75) 27.5,35.74 27.55,35.69 U6.16 ; SJ7.1 79.5,84.443 v1(79.5,80)
  Bottom Layer w0.293: v1(27.5,35.75) 27.5,30.75 39.571,18.679 48.189,18.679 48.848,18.021 55.981,18.021 76.25,38.289 76.25,76.75 v1(79.5,80)
GPS_RF: GPS_ANT.1 U6.2 | length 8.2
  Top Layer w0.254: GPS_ANT.1@26.35,12.95 GPS_ANT.1
  Top Layer w0.293: GPS_ANT.1@26.35,12.95 U6.2
GPS_RX: 
GPS_SCL: SJ16.1 U6.14 | length 14.4
  Top Layer w0.254: U6.14 29.95,32.35 30.7,31.6 35.039,31.6 36.335,30.304 SJ16.1
GPS_SDA: SJ17.1 U6.13 | length 11.8
  Top Layer w0.254: U6.13 31.15,33.017 31.323,32.844 SJ17.1
GPS_TX: 
GPS_WAKEUP: R6.2 SJ20.1 SJ21.1 SJ22.1 U6.12 | length 44.3
  Top Layer w0.293: R6.2 16.2,50.357 SJ20.1 16.043,45.923 21.761,40.205 24.488,40.205 24.722,39.971 24.722,36.064 24.45,35.791 24.45,31.884 24.684,31.649 28.451,31.649 29.7,30.4 U6.12
I2C0_SCL: pad.69 SJ12.1 SJ14.2 SJ16.2 SJ33.1 | length 123.2
  Top Layer w0.293: v1(19.75,83) 28.257,91.506 pad.69 ; SJ16.2 45.389,30 v1(51.25,30) 53.157,30 SJ12.1 ; v1(48.5,34.25) 57.5,43.25 SJ14.2 ; v1(51.5,23.5) 52.1,22.9 SJ33.1
  Bottom Layer w0.293: v1(19.75,83) 19,82.25 19,62.25 v1(51.25,30) ; v1@48.507,34.243 51.25,31.5 v1(51.25,30) ; v1(51.5,23.5) 51.5,29.74 51.25,29.99 v1(51.25,30)
I2C0_SDA: pad.65 SJ13.1 SJ15.2 SJ17.2 SJ34.1 | length 117.9
  Top Layer w0.293: v1(21.5,82.5) 30.797,91.797 pad.65 ; SJ17.2 v1(51.25,32.844) ; v1(52.123,24.25) 52.13,24.257 52.514,24.257 SJ34.1 ; SJ13.1 52.705,32.844 v1(51.25,32.844) ; SJ15.2 60.25,43.701 51.25,34.701 v1(51.25,32.844)
  Bottom Layer w0.293: v1(21.5,82.5) 21.5,82.49 21.121,82.111 21.121,62.973 v1(51.25,32.844) 52.25,31.844 52.25,24.5 52.152,24.402 52.152,24.279 v1(52.123,24.25)
I2C1_SCL: pad.23
I2C1_SDA: pad.19
IMU_CS: SJ26.1 SJ30.1 U2.12 | length 5.4
  Bottom Layer w0.254: U2.12 34.36,80.34 34.81,80.79 34.81,80.81
  Bottom Layer w0.293: 34.81,80.81 SJ26.1@36.115,82.115 ; SJ26.1 SJ30.1
IMU_INT: SJ10.1 SJ11.1 U2.2 | length 37.3
  Top Layer w0.406: U2.2 44.52,64.92 48,68.4 54.4,74.8 v1(54.4,77.3) 60.416,83.316 60.416,84.146 SJ10.1 60.943,84.737 SJ11.1
IMU_SCL: SJ14.1 SJ27.1 U2.10 | length 64.8
  Top Layer w0.293: v1(55.25,49.5) 56.5,48.25 SJ14.1
  Bottom Layer w0.293: SJ27.1 25.9,78.61 29.182,75.328 34.868,75.328 U2.10 39.44,74.31 55.25,58.5 v1(55.25,49.5)
IMU_SDA: SJ15.1 SJ28.1 U2.9 | length 56.8
  Top Layer w0.293: v1(34.9,83.2) 38.68,83.2 U2.9 ; SJ15.1 61.464,49.607 61.464,49.714 v1(61.5,49.75)
  Bottom Layer w0.293: SJ28.1 32.2,83.2 v1(34.9,83.2) ; U2.9 62,59.88 62,50.25 v1(61.5,49.75)
IMU_VDDIO: C5.2 SJ25.2 U2.8 | length 33.5
  Top Layer w0.254: SJ25.2 23,63.757 28.557,63.757 39.4,74.6 ; 39.4,74.651 U2.8@44.52,79.771 ; U2.8 44.52,82.32 45.275,83.075 C5.2
  Bottom Layer w0.254: U2.8@44.52,79.771 U2.8
N$1: 
N$2: 
N$4: 
N$5: 
NetFB1_1: FB1.1 SJ8.2 | length 3.1
  Top Layer w1: FB1.1 66.828,26.9 SJ8.2
NetR1_1: R1.1 U6.19 | length 7.8
  Top Layer w0.293: U6.19 21.9,35.783 23.522,37.405 R1.1
NetR1_2: R1.2 R3.1 SJ1.1 SJ3.1 | length 114.1
  Top Layer w0.293: R3.1@15.3,44.7 15.3,44.6 15.753,44.146 16.94,44.146 21.882,39.205 ; v1(22,38.25) 22,39.087 21.882,39.205 ; R1.2 21.882,39.205 ; v1(73.5,63) 75.457,63 SJ1.1 ; v1(74,69.25) 75.607,69.25 SJ3.1
  Bottom Layer w0.293: v1(22,38.25) 23.75,36.5 27.63,36.5 35.014,29.117 35.014,27.462 36.589,25.886 36.589,24.831 40.67,20.75 55.75,20.75 73.5,38.5 v1(73.5,63) 73.5,68.75 v1(74,69.25)
NetR2_1: R2.1 U6.20 | length 9.5
  Top Layer w0.293: R2.1 19.812,30.588 21.2,29.2 U6.20
NetR2_2: R2.2 R4.1 SJ2.1 SJ4.1 | length 120.7
  Top Layer w0.293: R4.1 15.4,42.4 18.595,39.205 18.705,39.205 ; v1(17.75,38.25) 18.705,39.205 ; R2.2 18.705,39.205 ; SJ4.1 80.5,67.357 v1(80.5,62.25) 79.357,62.25 SJ2.1 SJ2.1@78.793,62.9
  Bottom Layer w0.293: v1(17.75,38.25) 39.25,16.75 57.75,16.75 80.5,39.5 v1(80.5,62.25)
NetR5_2: R5.2 U6.22 | length 4
  Top Layer w0.254: R5.2 U6.22
NetSJ18_1: SJ18.2 SJ19.1 U1.4 U1.5 | length 9.2
  Top Layer w0.254: U1.5 60.452,33.195 ; SJ19.1@59.352,36.992 SJ19.1 60.452,37.162 ; U1.4@61.722,33.365 U1.4 60.452,33.195 ; SJ18.2 60.452,37.162 ; 60.452,33.195 60.452,37.162
NetSJ35_1: SJ35.2 SJ36.1 U3.4 U3.5 | length 17.6
  Top Layer w0.406: SJ35.2 SJ36.1 46.815,17.525 U3.4 U3.5
PORT0: pad.15
PORT1: pad.13
PORT2: pad.11
PORT3: pad.9
PORT4: pad.7
PORT5: pad.5
SDO: SJ25.1 SJ29.1 SJ31.1 U2.11 | length 29.8
  Top Layer w0.293: SJ25.1@24.043,64.9 24.043,67.403 SJ31.1 36.54,79.9 U2.11 33.7,83.1 v1(33.7,84.3)
  Bottom Layer w0.293: SJ29.1 33.657,84.3 v1(33.7,84.3)
SPI_MISO: pad.62 SJ29.2 | length 9.4
  Bottom Layer w0.293: SJ29.2 31.2,91.522 33.337,93.659 pad.62
SPI_MOSI: pad.66 SJ28.2 | length 9.4
  Bottom Layer w0.293: SJ28.2 28.6,91.513 30.797,93.71 pad.66
SPI_SCK: pad.70 SJ27.2 | length 9.4
  Bottom Layer w0.293: SJ27.2 25.9,91.483 28.257,93.84 pad.70
UART0_RX: pad.61
UART0_TX: pad.59
UART1_RX: pad.57
UART1_TX: pad.55
UART2_RX: 
UART2_RX: pad.53 SJ1.2 | length 53.3
  Top Layer w0.293: pad.53 38.417,93.883 v1(40.4,91.9) ; v1(56.6,77.3) 68.657,65.243 SJ1.2
  Bottom Layer w0.293: v1(40.4,91.9) 50.673,81.627 50.841,81.627 ; 53.867,78.601 53.867,78.433 54.321,77.979 54.681,77.979 55.079,77.581 55.079,77.538 55.15,77.451 ; 55.204,77.396 55.317,77.3 55.466,77.3 v1(56.6,77.3)
  Bottom Layer w0.406: 50.841,81.627 cw(c50.87,78.63) 53.867,78.601 ; 55.15,77.451 ccw(c55.466,77.706) 55.204,77.396
UART2_TX: 
UART2_TX: pad.51 SJ2.2 | length 54.7
  Top Layer w0.293: pad.51 39.687,93.813 v1(44.5,89) ; v1(59.1,78.5) 69.662,67.938 74.976,67.938 77.212,65.702 78.191,65.702 SJ2.2
  Bottom Layer w0.293: v1(44.5,89) 48.6,89 v1(59.1,78.5)
UART3_RX: 
UART3_RX: pad.49 SJ3.2 | length 47.9
  Top Layer w0.293: pad.49 40.957,93.743 45.021,89.679 v1(46.5,89.679) ; v1(60.1,79.8) 68.457,71.443 SJ3.2
  Bottom Layer w0.293: v1(46.5,89.679) 50.321,89.679 60.093,79.907 60.093,79.807 v1(60.1,79.8)
UART3_TX: 
UART3_TX: pad.47 SJ4.2 | length 49.3
  Top Layer w0.293: pad.47 42.227,93.473 44.45,91.25 v1(45.5,91.25) ; v1(63.2,80.6) 68.714,80.6 SJ4.2@78.157,71.157
  Bottom Layer w0.293: v1(45.5,91.25) 51.75,91.25 62.4,80.6 v1(63.2,80.6)
VBACKUP: C4.1 GPS_BACKUP.1 U6.8 | length 10.1
  Top Layer w0.254: v1@37.449,24.8 v1(37.5,24.8)
  Top Layer w0.406: U6.8 37.049,24.4 v1@37.449,24.8
  Bottom Layer w0.254: v1(37.5,24.8) v1@37.5,24.851 ; GPS_BACKUP.1 GPS_BACKUP.1@38.35,30.4 ; C4.1@37.877,27.527 C4.1
  Bottom Layer w0.406: v1@37.5,24.851 37.877,25.228 C4.1@37.877,27.527 ; C4.1 GPS_BACKUP.1@38.35,30.4
VCC_ALT: C3.2 SJ5.2 SJ18.1 U1.1 U1.2 | length 22.2
  Top Layer w0.254: SJ18.1 68.257,32.913 SJ5.2
  Top Layer w1: U1.1 U1.2 63.314,30.695 63.7,31.08 64.491,31.08 C3.2 66.152,31.105 SJ5.2
VCC_ALT2: C7.2 SJ32.2 SJ35.1 U3.1 U3.2 | length 43.9
  Top Layer w0.406: SJ35.1 47.277,23.732 49.819,23.732 ; U3.2 58.95,20.075 56.35,20.075 C7.2 ; U3.1 58.75,21.275 57.6,20.125 C7.2 ; SJ32.2@68.457,21.6 64.1,21.6 59.281,26.419 52.506,26.419 49.819,23.732 ; 49.819,23.732 49.819,21.744 51.438,20.125 C7.2
VCC_GPS: C1.2 C2.2 FB1.2 R3.2 R4.2 R5.1 SJ20.2 U6.7 | length 84.7
  Top Layer w0.254: R4.2 13.6,42.4 16.1,39.9 R5.1 16.1,25.5 v1(24,17.6) ; v1(32.3,17.6) 37.595,22.895 37.595,23.2
  Top Layer w0.293: R4.2 R3.2 13.6,50.043 SJ20.2
  Top Layer w1: U6.7 37.595,23.2 38.36,23.965 C1.2 41.376,23.99 43.34,23.99 45.3,25.95 C2.2 50.45,25.95 52,27.5 63.375,27.5 FB1.2
  Bottom Layer w0.254: v1(24,17.6) v1(32.3,17.6)
VCC_IMU: R7.2 R8.2 SJ9.2 U2.6 | length 36.8
  Top Layer w0.254: R7.2 34.28,54.08 R7.2@34.36,54.16
  Top Layer w1: R8.2 34.28,51.78 34.28,54.08 34.28,56.96 U2.6 ; R8.2@34.3,51.034 37.064,48.269 48.647,48.269 51.778,51.4 SJ9.2
pads on no net: U1.6 U2.80 U2.81 U2.82 U2.83 U3.6 U6.15 U6.17 U6.18 U6.21 U6.23

## Polygon pours and split planes (outlines as drawn)
GND on GND (split plane): 298 vertices, not listed, extent 0.509,0.509 95.376,100.505
no net on GND (Plane2) (split plane): 298 vertices, not listed, extent 0.509,0.509 95.376,100.505

## Other copper
Top Layer:
  region: 3067 vertices and 0 holes, not listed, extent 48.592,41.83 55.041,47.828
Multi-Layer:
  the board outline again, w0.254

## Silkscreen, mask and mechanical layers (free items; w line width, h text height)
Top Overlay:
  drawing of 58 lines, arcs and shapes, not listed
  text "IMU Interrupt" at 53.9,89.4 h1.52
  text "GPIO5" at 62.3,87 h1
  text "GPS Interrupt" at 73.1,86.7 h1.52
  text "GPIO7" at 80.3,84.4 h1
  text "GPIO4" at 62.2,84.3 h1
  text "GPIO6" at 80.4,81.7 h1
  text "GPS UART" at 71.75,73 h1.52
  text "RX3" at 71.3,70.3 h1
  text "TX3" at 80.25,69.75 h1
  text "IMU Address" at 15.75,69.25 h1.52
  text "0" at 24.9,66.6 h1
  text "1" at 25.1,64.3 h1
  text "RX2" at 71.4,63.7 h1
  text "TX2" at 80.25,63.5 h1
  text "GPS WAKEUP" at 10.75,57 h1.52
  text "GPIO22" at 17.6,54.5 h1
  text "IMU" at 56.754,52.254 h1.52
  text "GPIO23" at 17.5,52 h1
  text "IMU Power" at 66.9,50.6 h1.52
  text "I2C" at 56.754,50.004 h1.52
  text "VCC" at 17.6,49.4 h1
  text "1" at 58.9,40.6 h1
  text "0" at 61.3,40.6 h1
  text "Altimeter" at 63.75,38.5 h1.52
  text "Address" at 63.754,36.254 h1.52
  text "Altimeter Power" at 71.8,28.4 h1.52
  text "GPS Power" at 71.7,24.8 h1.52
  text "Barometer Power" at 71.7,21.4 h1.52
  text "1" at 47.4,20 h1
  text "0" at 47.4,17.4 h1
  text "ROLAND" at 80.4,16.9 h1.75
  text "Barometer" at 38.6,15.2 h1.52
  text "NEILL" at 80.4,14.35 h1.75
  text "Address" at 39.7,13 h1.52
  text "SAMUAL" at 80.4,11.15 h1.75
  text "2023" at 7.769,10.1 h2
  text "DEWAN" at 80.4,8.6 h1.75
  text "REVC" at 3.996,3.808 h3
  text "SEN" at 80.508,3.808 h3
Bottom Overlay:
  drawing of 26 lines, arcs and shapes, not listed
  text "IMU CS" at 42.75,92.25 h1.52
  text "IMU SPI" at 33.75,91 h1.52
  text "LED->" at 22.677,88.554 h1 r270
  text "GPIO0" at 36.15,86.4 h1 r270
  text "GPIO1" at 38.9,86.4 h1 r270
  text "-" at 37.25,57.75 h2
  text "AUX I2C" at 59.25,46 h1.52
  text "+" at 37.25,33.167 h2

## Text inside footprints (layer, text, board x,y; h text height)
U2: Top Overlay "GND" at 49.981,70.248 h1.91 r270